# Altium PCB GLCD_Board.PcbDoc
Units mm, origin at the board's own origin, x right, y up, seen from the top; angles counter-clockwise.
Board outline 55 x 15 mm, 2 copper layers (Top Layer, Bottom Layer); 4 components, 20 nets, 32 pads, 0 vias.
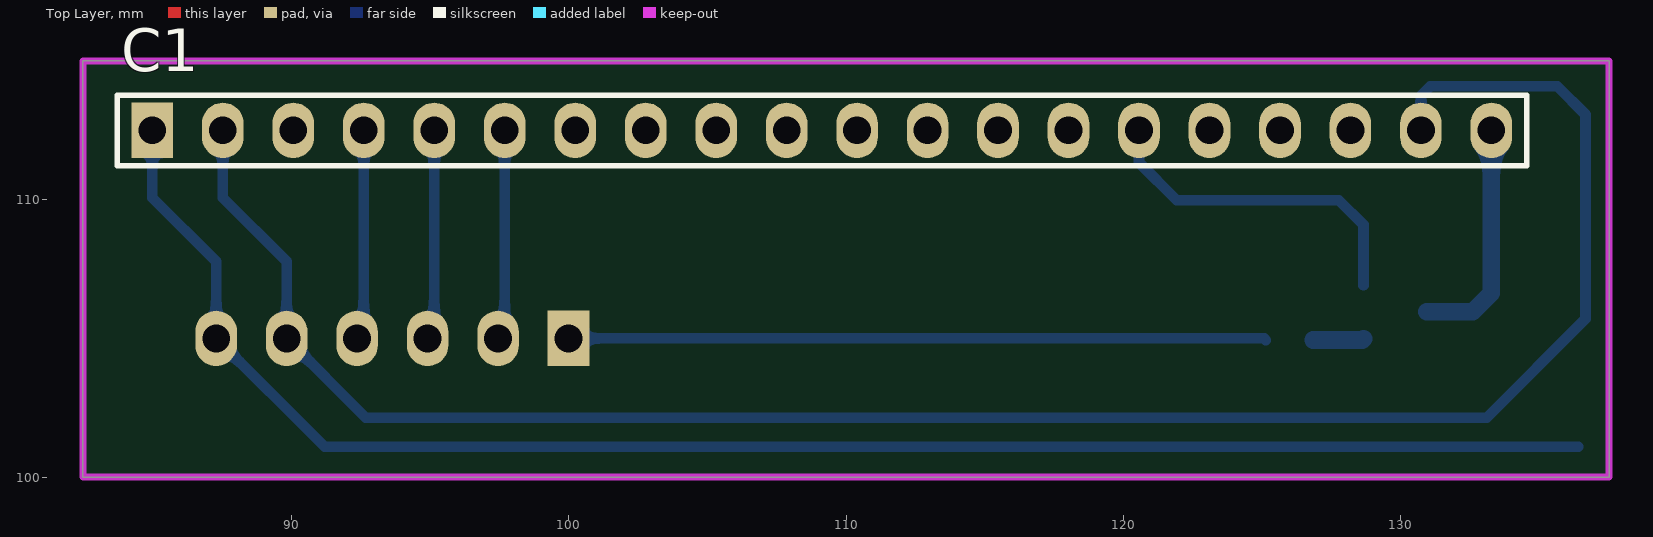
[diagram p0: Top Layer view]
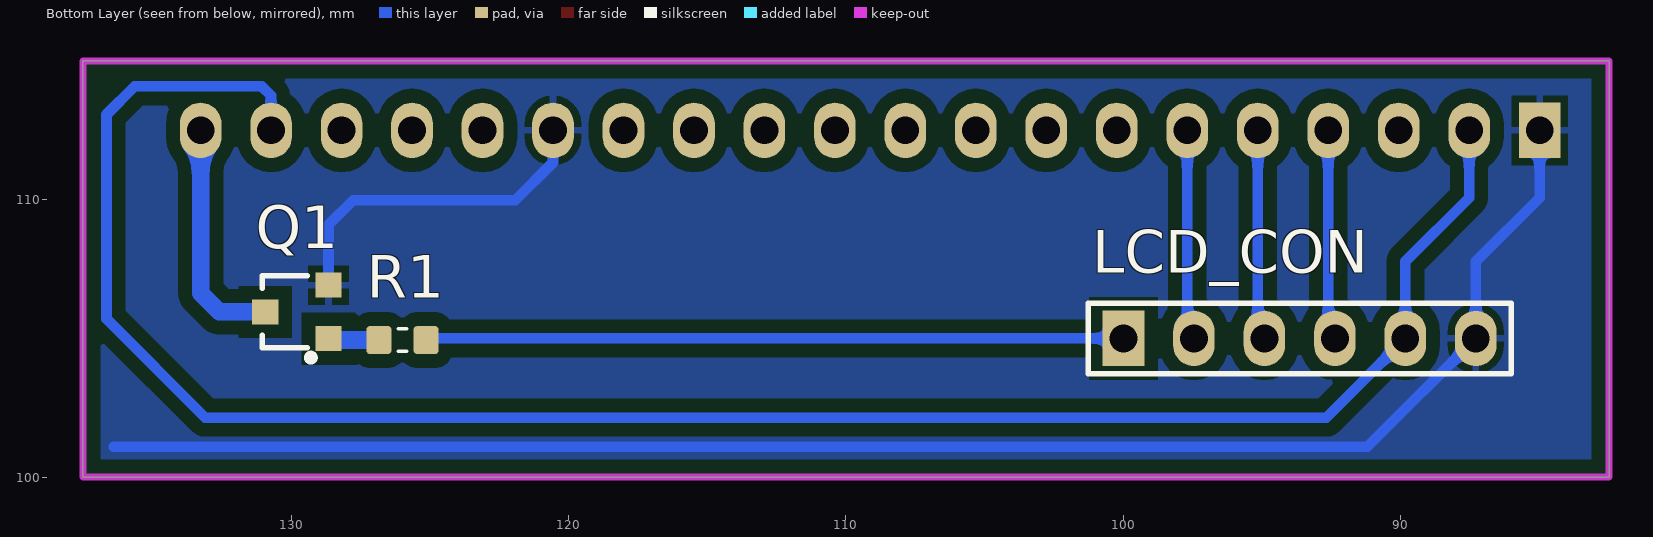
[diagram p1: Bottom Layer view, seen from below]
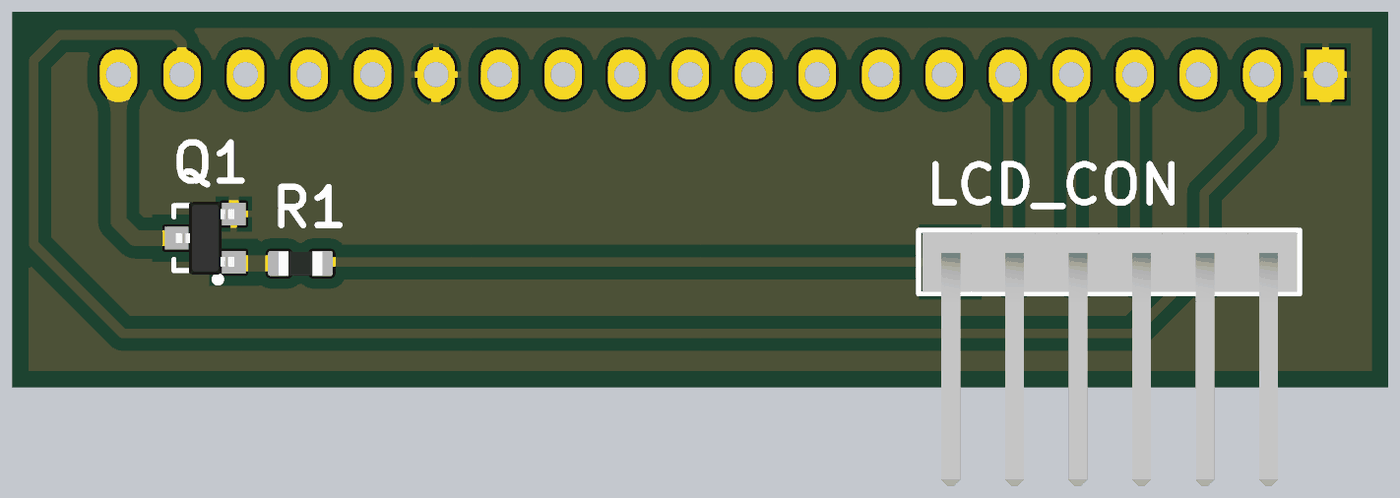
[diagram p2: 3D render of the assembled board from below, using the file's embedded part models]

## Layer stack, top to bottom
Top Solder: solder mask 0.0102, Solder Resist, Dk 3.5
Top Layer: signal copper 0.0356
Dielectric 1: dielectric 0.32, FR-4, Dk 4.8
Bottom Layer: signal copper 0.0356
Bottom Solder: solder mask 0.0102, Solder Resist, Dk 3.5

## Board outline
82.5,100 137.5,100 137.5,115 82.5,115

## Design rules (kind name [scope] priority, off if disabled: settings)
Clearance [All] p1: gap=0.5
PolygonConnect [All] p1: connectstyle=Relief reliefconductorwidth=0.254 reliefentries=4 polygonreliefangle="90 Angle" airgapwidth=0.254
RoutingVias [All] p1: holewidth=0.711 width=1.27 viastyle="Through Hole" minholewidth=0.711 minwidth=1.27 maxholewidth=0.711 maxwidth=1.27
SolderMaskExpansion [All] p1: expansion=0.102
Width [All] p1: maxlimit=0.762 minlimit=0.254 preferedwidth=0.254
30 further rules are at their usual default settings.

## Components (designator, comment, footprint, x,y, rotation, side; value= is the part's Value field where it differs from the comment)
C1 "Header 20" HDR1X20 85,112.5 r0 top
LCD_CON "Header 6" "Header 6 way 90" 100,105 r180 bottom
Q1 "C828" "SOT23 TOP" 129.794,105.958 r90 bottom
R1 "Res" RESC1608N_ZERO 125.984,104.942 r0 bottom

## Footprints (in the part's own frame and the unit in brackets; to place one, negate y for a bottom-side part, rotate by r counter-clockwise, add the part's x,y. Pads: shape width x height; smd on the part's side, far side on the other; paste and mask are expansions set on the pad)
HDR1X20 [mm] "Connector; Header; 20 Position"
  rect 1.5x2 hole 1: 1(0,0)
  oval 1.5x2 hole 1: 2(2.54,0) 3(5.08,0) 4(7.62,0) 5(10.16,0) 6(12.7,0) 7(15.24,0) 8(17.78,0) 9(20.32,0) 10(22.86,0) 11(25.4,0) 12(27.94,0) 13(30.48,0) 14(33.02,0) 15(35.56,0) 16(38.1,0) 17(40.64,0) 18(43.18,0) 19(45.72,0) 20(48.26,0)
  silkscreen extent -1.27,-1.27 49.53,1.27
"Header 6 way 90" [mm]
  rect 1.5x2 hole 1: 1(0,0)
  oval 1.5x2 hole 1: 2(2.54,0) 3(5.08,0) 4(7.62,0) 5(10.16,0) 6(12.7,0)
  silkscreen extent -1.27,-1.27 13.97,1.27, body extent -1.12,-8.94 13.87,1.14, height 5.88
RESC1608N_ZERO [mm] "Chip Resistor, Body 1.6x0.8mm, 0603, IPC Medium Density"
  round 0.254 on Mech14: 0(0,0)
  rrect25% 0.9x1 smd: 1(-0.85,0) 2(0.85,0)
  Top Layer pour cut-out: -0.4,0.6 0.4,0.6 0.4,-0.6 -0.4,-0.6
  silkscreen extent -0.15,-0.41 0.15,0.41, body extent -0.87,-0.47 0.88,0.48, height 0.54
"SOT23 TOP" [mm]
  rect 0.9x0.95 smd: 1(-0.965,-1.143) 2(0,1.143) 3(0.965,-1.143)
  silkscreen extent -1.77,-0.63 1.3,1.25, body extent -1.46,-1.17 1.46,1.17, height 1

## Part data
C1: "Header, 20-Pin"
LCD_CON: "Header, 6-Pin"
Q1: library part NPN, "Transistor C828 C1815...."

## Nets (pads, with @x,y where several pads share a name; then routed paths per layer and width w, separated by ;. In a path a pad name is that pad's centre, name@x,y a point inside that pad or via, vN(x,y) a via of type N, cw(c..) or ccw(c..) an arc to the next point about the centre after c; other vN are vias at no path point)
BL_CTR: LCD_CON.1 R1.1 | length 25.2
  Bottom Layer w0.381: LCD_CON.1 125.076,105 R1.1
BLA: C1.2 C1.19 LCD_CON.5 | length 73
  Bottom Layer w0.381: C1.2 87.54,110.072 89.84,107.772 LCD_CON.5 92.692,102.148 133.096,102.148 136.652,105.704 136.652,113.07 135.636,114.086 131.064,114.086 130.72,113.742 C1.19
BLK: C1.20 Q1.2 | length 8.5
  Bottom Layer w0.635: Q1.2 132.588,105.958 133.26,106.63 C1.20
DB0: C1.7
DB1: C1.8
DB2: C1.9
DB3: C1.10
DB4: C1.11
DB5: C1.12
DB6: C1.13
DB7: C1.14
EN: C1.6 LCD_CON.2 | length 7.6
  Bottom Layer w0.381: LCD_CON.2 97.7,105.24 C1.6
GND: C1.1 C1.15 LCD_CON.6 Q1.3 | length 71.5
  Bottom Layer w0.381: C1.1 85,110.072 87.3,107.772 LCD_CON.6 91.208,101.092 136.398,101.092 ; C1.15 120.56,111.342 121.92,109.982 127.762,109.982 128.651,109.093 Q1.3
NC: C1.16
NetQ1_1: Q1.1 R1.2 | length 1.8
  Bottom Layer w0.635: R1.2 128.6,104.942 Q1.1
RS: C1.4 LCD_CON.4 | length 7.6
  Bottom Layer w0.381: LCD_CON.4 92.62,105.24 C1.4
RST: C1.17
RW: C1.5 LCD_CON.3 | length 7.6
  Bottom Layer w0.381: LCD_CON.3 95.16,105.24 C1.5
V0: C1.3
VOUT: C1.18
pads on no net: R1.0

## Polygon pours and split planes (outlines as drawn)
GND on Bottom Layer "GND_L02_P008" (solid, pour order 8): 82.5,100 137.5,100 137.5,115 82.5,115

## Keep-outs
Keep-Out Layer:
  the board outline again, w0.254